# Altium PCB PCB.PcbDoc
Units mm, origin at the board's own origin, x right, y up, seen from the top; angles counter-clockwise.
Board outline 100 x 90 mm, 2 copper layers (Top Layer, Bottom Layer); 30 components, 42 nets, 137 pads, 3 vias.
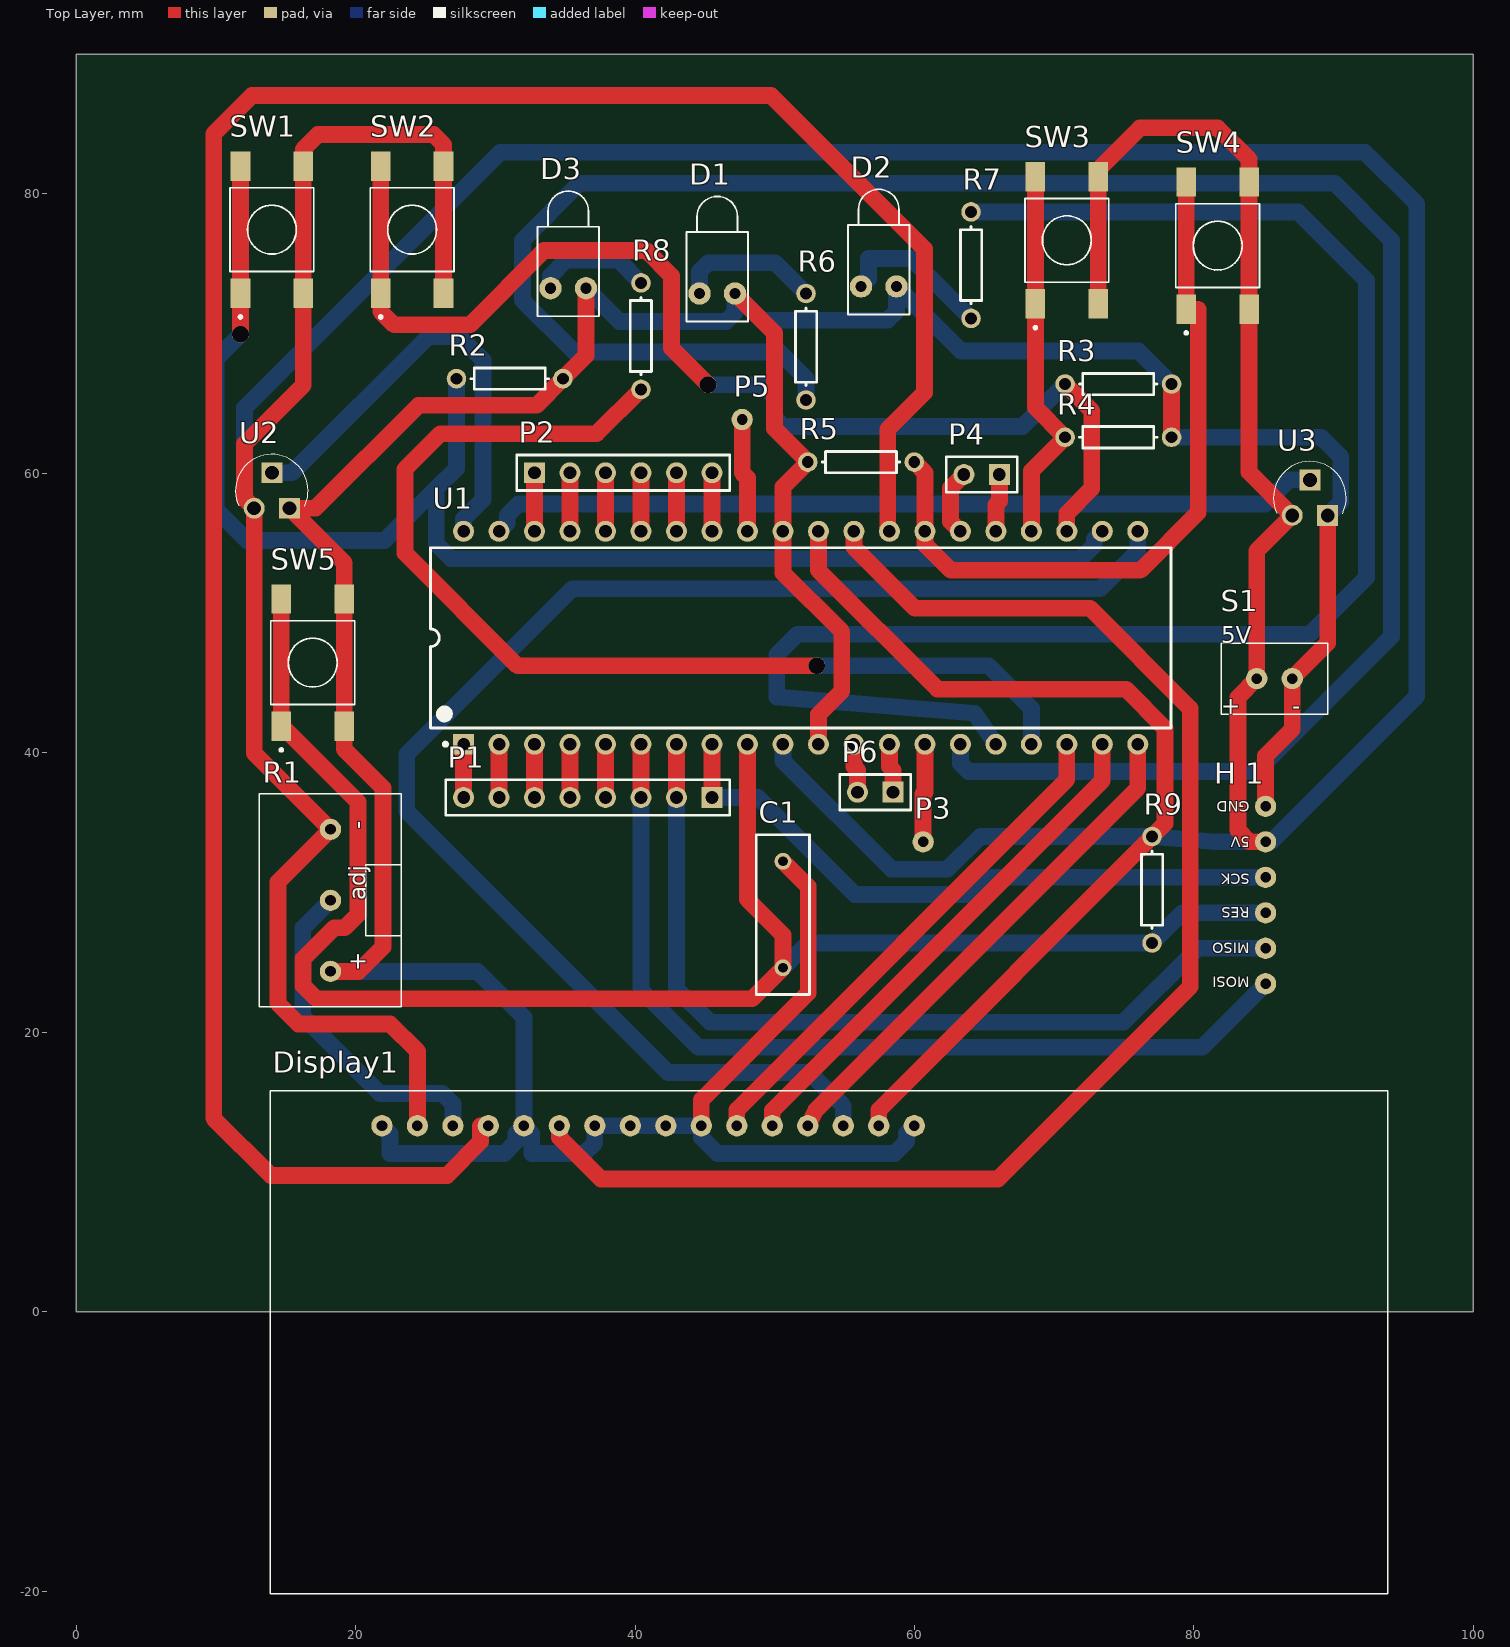
[diagram p0: Top Layer view]
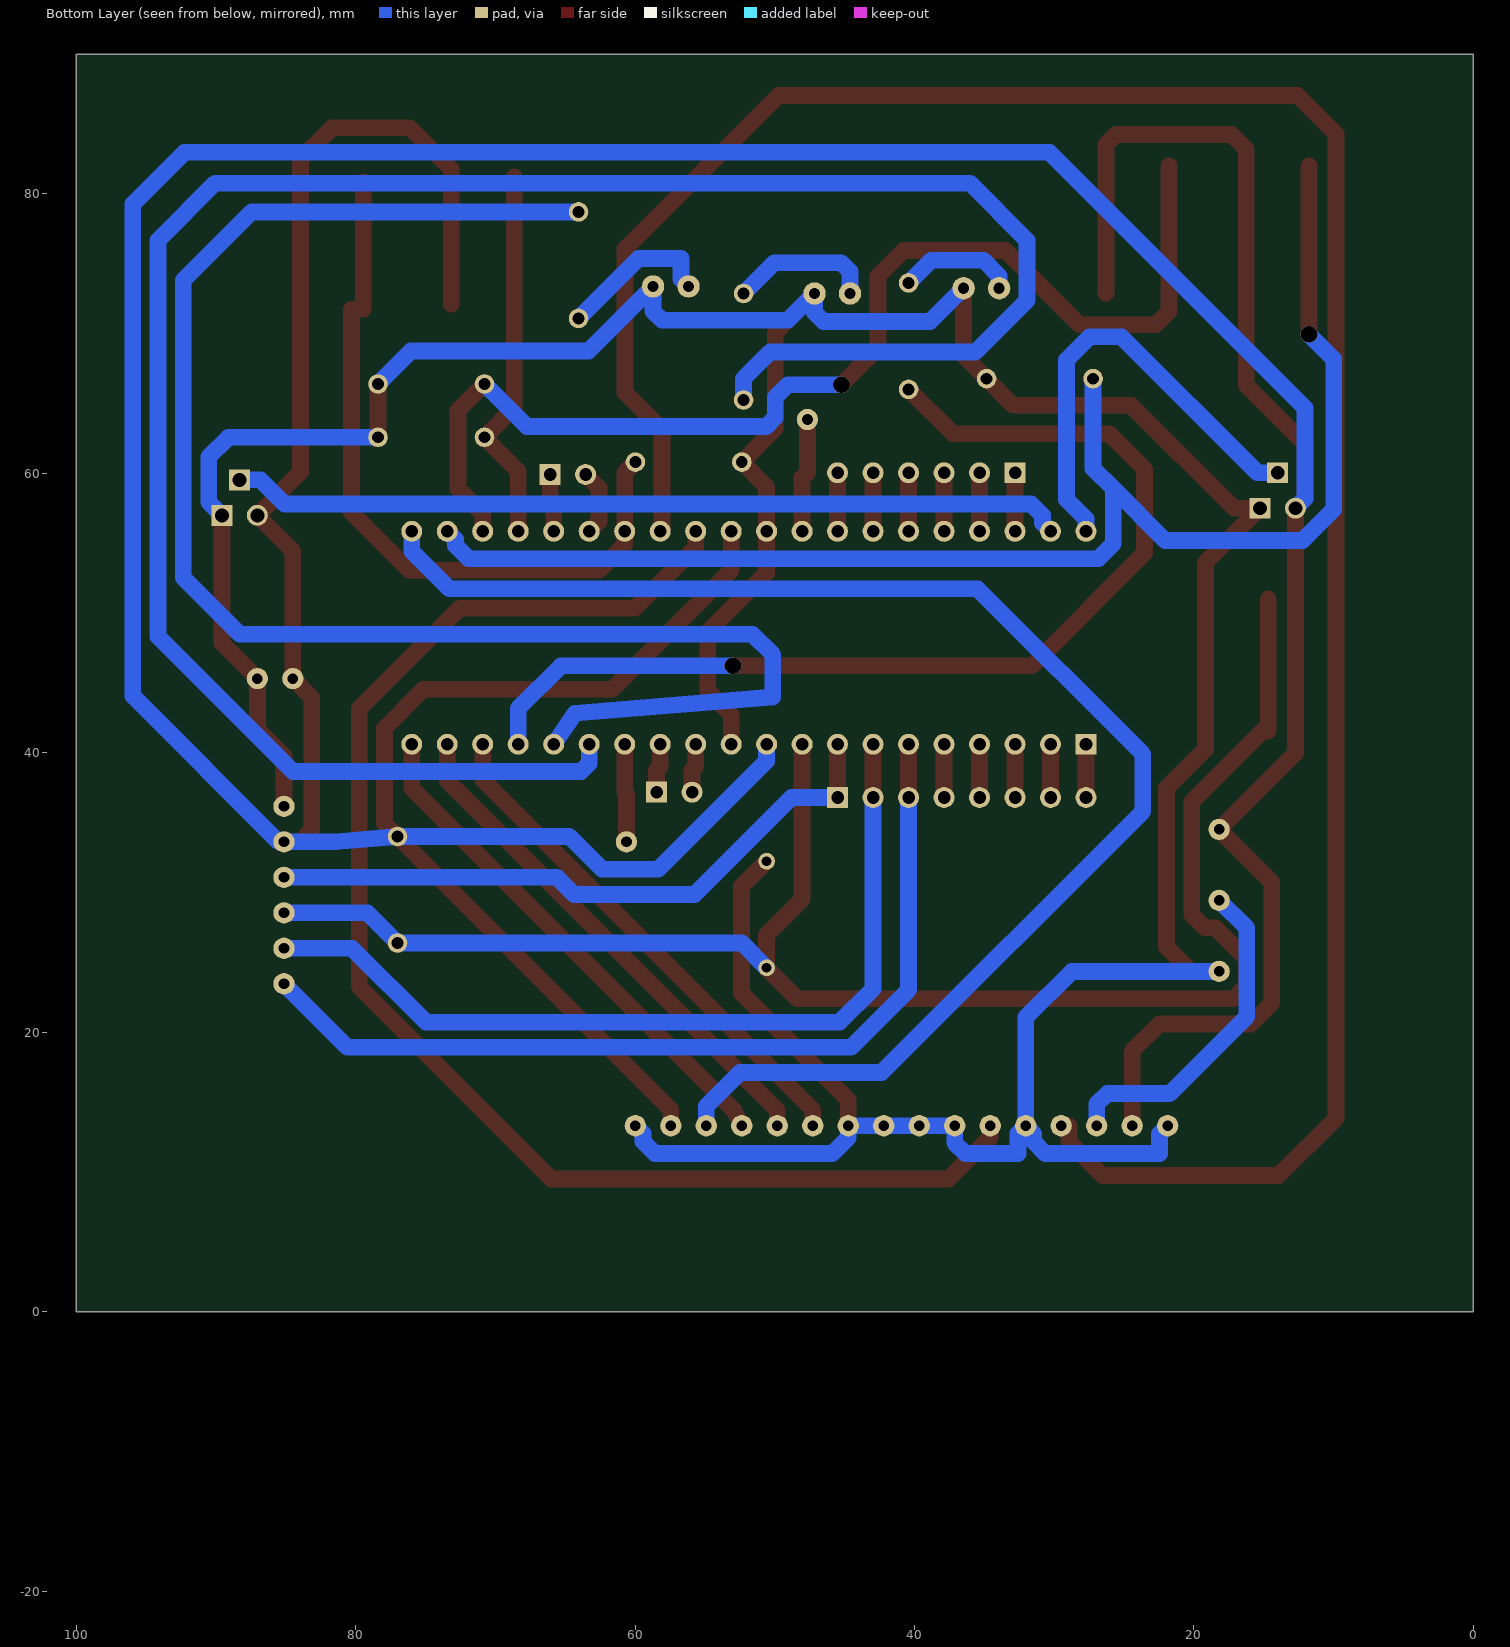
[diagram p1: Bottom Layer view, seen from below]

## Layer stack, top to bottom
Top Solder: solder mask 0.0102, Solder Resist, Dk 3.5
Top Layer: signal copper 0.0356
Dielectric 1: dielectric 0.32, FR-4, Dk 4.8
Bottom Layer: signal copper 0.0356
Bottom Solder: solder mask 0.0102, Solder Resist, Dk 3.5

## Board outline
0,90 100,90 100,0 0,0

## Design rules (kind name [scope] priority, off if disabled: settings)
Clearance [All] p1: gap=0.6 ignorepadtopadclearanceinfootprint=FALSE
PolygonConnect [All] p1: connectstyle=Relief reliefconductorwidth=0.254 reliefentries=4 polygonreliefangle="90 Angle" airgapwidth=0.254
RoutingVias [All] p1: holewidth=1.2 width=1.2 viastyle="Through Hole" minholewidth=1.2 minwidth=1.2 maxholewidth=1.2 maxwidth=1.2
SolderMaskExpansion [All] p1: expansion=0.102
Width [All] p1: maxlimit=1.5 minlimit=1 preferedwidth=1.2
30 further rules are at their usual default settings.

## Components (designator, comment, footprint, x,y, rotation, side; value= is the part's Value field where it differs from the comment)
C1 "Cap" RAD-0.3 50.584,28.42 r90 top value=10uF
D1 "LED1" LED-1 45.885,72.87 r90 top
D2 "LED1" LED-1 57.442,73.378 r90 top
D3 "LED1" LED-1 35.217,73.251 r90 top
Display1 "LCD 16 x 2" LCD16x2 13.882,15.807 r0 top
"H 1" "Programator" USBASP 85.128,23.467 r90 top
P1 "Header 8" HDR1X8 45.504,36.802 r180 top
P2 "Header 6" HDR1X6 32.804,60.043 r0 top
P3 "Header 1" "Header 1" 60.617,33.627 r0 top
P4 "Header 2" HDR1X2 66.078,59.916 r180 top
P5 "Header 1" "Header 1" 47.663,63.853 r0 top
P6 "Header 2" HDR1X2 58.458,37.183 r180 top
R1 "10k" ADJ_RES 18.199,29.436 r90 top
R2 "Res1" AXIAL-0.3 31.026,66.774 r180 top value=10K
R3 "Res1" AXIAL-0.3 74.587,66.393 r180 top value=10K
R4 "Res1" AXIAL-0.3 74.587,62.583 r180 top value=10K
R5 "Res1" AXIAL-0.3 56.172,60.805 r0 top value=10K
R6 "Res1" AXIAL-0.3 52.235,69.06 r270 top value=470
R7 "Res1" AXIAL-0.3 64.046,74.902 r90 top value=470
R8 "Res1" AXIAL-0.3 40.424,69.822 r270 top value=470
R9 "Res1" AXIAL-0.3 77,30.198 r270 top value=10K
S1 "Prikljucak 5V" "H 5V" 84.493,45.311 r0 top
SW1 "2-1437565-8" *SW_SMD_2-1437565-8_4_4.50_6.00_6.00_5.00 14.008,77.442 r90 top
SW2 "2-1437565-8" *SW_SMD_2-1437565-8_4_4.50_6.00_6.00_5.00 24.041,77.442 r90 top
SW3 "2-1437565-8" *SW_SMD_2-1437565-8_4_4.50_6.00_6.00_5.00 70.904,76.68 r90 top
SW4 "2-1437565-8" *SW_SMD_2-1437565-8_4_4.50_6.00_6.00_5.00 81.699,76.299 r90 top
SW5 "2-1437565-8" *SW_SMD_2-1437565-8_4_4.50_6.00_6.00_5.00 16.929,46.454 r90 top
U1 "ATmega32-16PI" 40P6 51.854,48.232 r90 top
U2 "LM35DZ" *TO127P254X495-3P 15.278,60.043 r0 top
U3 "LM35DZ" *TO127P254X495-3P 89.573,59.535 r0 top

## Footprints (in the part's own frame and the unit in brackets; to place one, negate y for a bottom-side part, rotate by r counter-clockwise, add the part's x,y. Pads: shape width x height; smd on the part's side, far side on the other; paste and mask are expansions set on the pad)
40P6 [mm] "DIP, 40-Leads, Row Spacing 15.24mm, Pitch 2.54mm, Body 52.2x13.95mm"
  rect 1.5x1.5 hole 0.9: 1(-7.62,24.13)
  round 1.5 hole 0.9: 2(-7.62,21.59) 3(-7.62,19.05) 4(-7.62,16.51) 5(-7.62,13.97) 6(-7.62,11.43) 7(-7.62,8.89) 8(-7.62,6.35) 9(-7.62,3.81) 10(-7.62,1.27) 11(-7.62,-1.27) 12(-7.62,-3.81) 13(-7.62,-6.35) 14(-7.62,-8.89) 15(-7.62,-11.43) 16(-7.62,-13.97) 17(-7.62,-16.51) 18(-7.62,-19.05) 19(-7.62,-21.59) 20(-7.62,-24.13) 21(7.62,-24.13) 22(7.62,-21.59) 23(7.62,-19.05) 24(7.62,-16.51) 25(7.62,-13.97) 26(7.62,-11.43) 27(7.62,-8.89) 28(7.62,-6.35) 29(7.62,-3.81) 30(7.62,-1.27) 31(7.62,1.27) 32(7.62,3.81) 33(7.62,6.35) 34(7.62,8.89) 35(7.62,11.43) 36(7.62,13.97) 37(7.62,16.51) 38(7.62,19.05) 39(7.62,21.59) 40(7.62,24.13)
  silkscreen extent -7.74,-26.5 6.45,26.5, body extent -7.05,-26.47 7.05,26.47, height 4.83
*SW_SMD_2-1437565-8_4_4.50_6.00_6.00_5.00 [mm]
  rect 2.1x1.4 smd: 1(-4.55,2.25) 2(4.55,2.25) 3(-4.55,-2.25) 4(4.55,-2.25)
  silkscreen extent -6.35,-3 3,3
*TO127P254X495-3P [mil]
  round 59 hole 39: 1(-100,-100)
  rect 59x59 hole 39: 2(-50,0) 3(0,-100)
  silkscreen extent -153,-95 52,52
ADJ_RES [mil] "Promenljivi Otpornik"
  round 60 hole 30: 1(-200,0) 2(200,0) 3(0,0)
  silkscreen extent -300,-200 300,200
AXIAL-0.3 [mm] "Axial Device, Thru-Hole; 2 Leads; 0.3 in Pin Spacing"
  round 1.4 hole 0.85: 1(-3.81,0) 2(3.81,0)
  silkscreen extent -2.77,-0.76 2.77,0.76
"H 5V" [mil] "prikljucak 5 volti"
  round 60 hole 30: 1(0,0) 2(100,0)
  silkscreen extent -100,-100 200,100
HDR1X2 [mm] "Connector; Header; 2 Position"
  rect 1.5x1.5 hole 0.9: 1(0,0)
  round 1.5 hole 0.9: 2(2.54,0)
  silkscreen extent -1.27,-1.27 3.81,1.27
HDR1X6 [mm] "Connector; Header; 6 Position"
  rect 1.5x1.5 hole 0.9: 1(0,0)
  round 1.5 hole 0.9: 2(2.54,0) 3(5.08,0) 4(7.62,0) 5(10.16,0) 6(12.7,0)
  silkscreen extent -1.27,-1.27 13.97,1.27
HDR1X8 [mm] "Connector; Header; 8 Position"
  rect 1.5x1.5 hole 0.9: 1(0,0)
  round 1.5 hole 0.9: 2(2.54,0) 3(5.08,0) 4(7.62,0) 5(10.16,0) 6(12.7,0) 7(15.24,0) 8(17.78,0)
  silkscreen extent -1.27,-1.27 19.05,1.27
"Header 1" [mil]
  round 60 hole 30: 1(0,0)
LCD16x2 [mil] "LCD16x2"
  round 60 hole 30: 1(314.96,-98.43) 2(414.96,-98.43) 3(514.96,-98.43) 4(614.96,-98.43) 5(714.96,-98.43) 6(814.96,-98.43) 7(914.96,-98.43) 8(1014.96,-98.43) 9(1114.96,-98.43) 10(1214.96,-98.43) 11(1314.96,-98.43) 12(1414.96,-98.43) 13(1514.96,-98.43) 14(1614.96,-98.43) 15(1714.96,-98.43) 16(1814.96,-98.43)
  silkscreen extent 0,-1417 3150,0
LED-1 [mm] "LED; 2 Leads"
  round 1.6 hole 0.8: 1(0,1.27) 2(0,-1.27)
  silkscreen extent -2,-2.2 6.95,2.2
RAD-0.3 [mm] "Radial Cap, Thru-Hole; 2 Leads; 0.3 in Pin Spacing"
  round 1.2 hole 0.7: 1(-3.81,0) 2(3.81,0)
  silkscreen extent -5.71,-1.91 5.71,1.91
USBASP [mil]
  round 60 hole 30: 1(0,0) 2(100,0) 3(200,0) 4(300,0) 5(400,0) 6(500,0)

## Part data
C1: "Capacitor", LatestRevisionDate=17-Jul-2002, LatestRevisionNote="Re-released for DXP Platform.", PackageDescription="Radial Cap, Thru-Hole; 2 Leads; 0.3 in Pin Spacing", PackageReference=RAD-0.3, Published=8-Jun-2000, Publisher="Altium Limited"
D1 D2 D3: "Typical RED GaAs LED", LatestRevisionDate=08-Jul-2005, LatestRevisionNote="Mech Layer 1 removed.", PackageDescription="LED; 2 Leads", PackageReference=LED-1, Published=8-Jun-2000, Publisher="Altium Limited"
Display1: library part "LCD 16 X 2"
"H 1": library part USBASP
P1: "Header, 8-Pin", LatestRevisionDate=17-Jul-2002, LatestRevisionNote="Re-released for DXP Platform.", Publisher="Altium Limited"
P2: "Header, 6-Pin", LatestRevisionDate=17-Jul-2002, LatestRevisionNote="Re-released for DXP Platform.", Publisher="Altium Limited"
P4 P6: "Header, 2-Pin", LatestRevisionDate=17-Jul-2002, LatestRevisionNote="Re-released for DXP Platform.", Publisher="Altium Limited"
R1: library part ADJ_RES
R2 R3 R4 R5 R6 R7 R8 R9: "Resistor", LatestRevisionDate=17-Jul-2002, LatestRevisionNote="Re-released for DXP Platform.", PackageDescription="Axial Device, Thru-Hole; 2 Leads; 0.3 in Pin Spacing", PackageReference=AXIAL-0.3, Published=8-Jun-2000, Publisher="Altium Limited"
S1: library part "Header 5V"
SW1 SW2 SW3 SW4 SW5: "Tactile Switch SPST-NO Top Actuated Surface Mount", Contact_Current_Rating="50 mA", Package=None, Availability=Unavailable, Configuration_Pole-Throw="Single Pole - Single Throw", MF="TE Connectivity", MP=2-1437565-8, Price=None, SnapEDA_Link=https://www.snapeda.com/parts/2-1437565-8/TE%20Connectivity%20ALCOSWITCH%20Switches/view-part/455292/?ref=snap, TE_purchase_URL=https://www.te.com/usa-en/product-2-1437565-8.html?te_bu=Cor&te_type=disp&te_campaign=seda_glo_cor-seda-global-disp-prtnr-fy19-seda-model-bom-cta_sma-317_1&elqCampaignId=32493
U1: "8-Bit AVR Microcontroller with 32K Bytes of In-System Programmable Flash Memory", Supplier Part Number 1=ATMEGA32-16PI-ND, Code_JEDEC=MS-011-AC, ComponentLink1Description=Datasheet, ComponentLink1URL=http://www.atmel.com/dyn/resources/prod_documents/doc2503.pdf, ComponentLink2Description="Atmel.com Home", ComponentLink2URL=http://www.atmel.com, DatasheetVersion=2503C-AVR-10/02, PackageDescription="40-lead (0.600\"/15.24mm Wide) Plastic Dual Inline Package (PDIP)", PackageReference=40P6, PackageVersion="revB, Sep-2001", Published=17-Sep-2003, Publisher="Altium Limited", Supplier 1=Digi-Key, Supplier 2=Farnell, Supplier 3=Mouser, Supplier Part Number 2=4376328, Supplier Part Number 3=556-ATMEGA32-16PI
U2 U3: "Temperature Sensor Analog, Local 0°C ~ 100°C 10mV/°C TO-92-3", Package="TO-226-3 Misc", Availability=Unavailable, MF="Texas Instruments", MP=LM35DZ, Price=None, SnapEDA_Link=https://www.snapeda.com/parts/LM35DZ/Texas%20Instruments/view-part/891192/?ref=snap

## Via types
v1: diameter 1.2, hole 1.2, Top Layer to Bottom Layer, 3 vias

## Nets (pads, with @x,y where several pads share a name; then routed paths per layer and width w, separated by ;. In a path a pad name is that pad's centre, name@x,y a point inside that pad or via, vN(x,y) a via of type N, cw(c..) or ccw(c..) an arc to the next point about the centre after c; other vN are vias at no path point)
+5V: "H 1.5" Display1.2 Display1.15 R1.2 R9.1 S1.1 SW1.3 SW1.4 SW2.3 SW2.4 SW3.3 SW3.4 SW4.3 SW4.4 U1.10 U1.30 U2.1 U3.1 | length 440.9
  Top Layer w1.2: Display1.2 24.422,18.641 22.469,20.594 15.913,20.594 14.437,22.07 14.437,30.754 R1.2 12.738,39.977 U2.1 12.052,58.189 12.052,62.111 16.258,66.317 SW1.3 SW1.4 16.258,83.197 17.31,84.249 25.565,84.249 26.291,83.523 SW2.4 SW2.3 ; U1.30 53.124,53.057 61.632,44.549 75.14,44.549 77.934,41.755 77.934,34.942 R9.1 57.442,14.45 Display1.15 ; SW3.3 SW3.4 73.154,81.76 76.126,84.732 81.699,84.732 83.949,82.482 SW4.4 SW4.3 83.949,60.079 U3.1 84.493,54.455 S1.1 83.147,43.965 83.147,34.465 83.985,33.627 85.128,33.627
  Bottom Layer w1.2: U2.1 12.052,58.189 12.052,64.691 30.34,82.979 92.24,82.979 95.948,79.271 95.948,44.066 85.509,33.627 85.128,33.627 81.445,33.627 R9.1 64.706,34.008 62.363,31.665 58.337,31.665 50.584,39.418 U1.10
GND: "H 1.6" C1.2 D1.2 D2.2 D3.2 Display1.1 Display1.5 Display1.7 Display1.8 Display1.9 Display1.10 Display1.16 R1.1 R2.1 R3.1 R4.1 R5.1 S1.2 SW5.3 SW5.4 U1.11 U1.31 U2.3 U3.3 | length 293.2
  Top Layer w1.2: R1.1 20.212,24.356 21.961,26.105 21.961,37.474 19.179,40.256 SW5.3 SW5.4 19.179,53.602 U2.3 17.135,57.503 24.506,64.874 32.936,64.874 R2.1 36.487,68.425 D3.2 ; Display1.10 44.742,15.161 52.387,22.807 52.387,30.427 C1.2 ; D1.2 49.974,70.051 49.974,63.193 R5.1 50.584,59.027 U1.31 50.584,52.877 54.797,48.664 54.797,44.425 53.124,42.752 U1.11 ; R4.1 R3.1 ; 85.128,36.167 85.128,39.774 87.033,41.679 S1.2 89.573,47.851 U3.3
  Bottom Layer w1.2: R1.1 28.74,24.356 32.042,21.054 Display1.5 ; Display1.1 22.466,12.723 22.466,11.326 30.645,11.326 31.458,12.139 31.458,12.723 Display1.5 ; D3.2 38.875,70.863 46.52,70.863 47.155,71.498 D1.2 49.06,70.965 58.077,70.965 58.712,71.6 D2.2 63.335,68.755 76.035,68.755 R3.1 ; Display1.16 59.423,12.748 59.423,12.164 58.585,11.326 45.885,11.326 44.742,12.469 Display1.10 Display1.9 Display1.8 Display1.7 37.122,12.088 36.36,11.326 32.601,11.326 32.601,12.748 Display1.5 ; R4.1 89.116,62.583 90.513,61.186 90.513,57.935 U3.3
NetC1_1: "H 1.3" C1.1 R9.2 SW5.1 SW5.2 U1.9 | length 121.1
  Top Layer w1.2: SW5.2 SW5.1 14.679,41.552 15.087,41.552 20.161,36.478 20.161,28.42 19.215,27.474 18.466,27.474 16.237,25.245 16.237,23.34 17.183,22.394 48.368,22.394 C1.1 50.584,26.972 48.044,29.512 U1.9
  Bottom Layer w1.2: C1.1 52.362,26.388 R9.2 79.159,28.547 85.128,28.547
NetD1_1: D1.1 R6.1 | length 10.4
  Bottom Layer w1.2: D1.1 44.615,74.445 45.25,75.08 50.025,75.08 R6.1
NetD2_1: D2.1 R7.1 | length 11.3
  Bottom Layer w1.2: D2.1 56.705,73.911 56.705,75.385 59.753,75.385 R7.1
NetD3_1: D3.1 R8.1 | length 8.5
  Bottom Layer w1.2: D3.1 33.947,74.14 35.065,75.258 38.798,75.258 R8.1
NetDisplay1_3: Display1.3 R1.3 | length 24
  Bottom Layer w1.2: R1.3 16.218,27.455 16.218,21.13 21.73,15.618 26.2,15.618 26.962,14.856 Display1.3
NetDisplay1_4: Display1.4 U1.28 | length 171.9
  Top Layer w1.2: Display1.4 28.943,13.307 28.943,12.164 26.53,9.751 13.932,9.751 9.842,13.84 9.842,84.3 12.586,87.043 49.746,87.043 60.719,76.07 60.719,65.783 58.077,63.142 58.077,55.979 U1.28
NetDisplay1_6: Display1.6 U1.29 | length 102.8
  Top Layer w1.2: Display1.6 34.582,12.469 37.554,9.497 65.976,9.497 79.734,23.255 79.734,43.187 72.58,50.34 60.033,50.34 55.664,54.709 U1.29
NetDisplay1_11: Display1.11 U1.18 | length 37.1
  Top Layer w1.2: Display1.11 47.282,14.45 70.904,38.072 U1.18
NetDisplay1_12: Display1.12 U1.19 | length 37.1
  Top Layer w1.2: Display1.12 49.822,14.402 73.444,38.024 U1.19
NetDisplay1_13: Display1.13 U1.20 | length 37
  Top Layer w1.2: Display1.13 52.946,14.45 75.984,37.488 U1.20
NetDisplay1_14: Display1.14 U1.21 | length 105.2
  Bottom Layer w1.2: Display1.14 54.902,14.704 52.489,17.117 42.354,17.117 23.66,35.811 23.66,39.901 35.496,51.737 73.292,51.737 75.984,54.43 U1.21
"NetH 1_1": "H 1.1" P1.3 U1.6 | length 65.9
  Top Layer w1.2: P1.3 U1.6
  Bottom Layer w1.2: P1.3 40.424,23.035 44.542,18.917 80.578,18.917 85.128,23.467
"NetH 1_2": "H 1.2" P1.2 U1.7 | length 62.8
  Top Layer w1.2: P1.2 U1.7
  Bottom Layer w1.2: P1.2 42.964,23.111 45.358,20.717 74.967,20.717 80.257,26.007 85.128,26.007
"NetH 1_4": "H 1.4" P1.1 U1.8 | length 46.8
  Top Layer w1.2: P1.1 U1.8
  Bottom Layer w1.2: P1.1 48.799,36.802 55.736,29.865 64.355,29.865 65.577,31.087 85.128,31.087
NetP1_4: P1.4 U1.5 | length 3.8
  Top Layer w1.2: P1.4 U1.5
NetP1_5: P1.5 U1.4 | length 3.8
  Top Layer w1.2: P1.5 U1.4
NetP1_6: P1.6 U1.3 | length 3.8
  Top Layer w1.2: P1.6 U1.3
NetP1_7: P1.7 U1.2 | length 3.8
  Top Layer w1.2: P1.7 U1.2
NetP1_8: P1.8 U1.1 | length 3.8
  Top Layer w1.2: P1.8 U1.1
NetP2_1: P2.1 U1.38 | length 4.2
  Top Layer w1.2: U1.38 P2.1
NetP2_2: P2.2 U1.37 | length 4.2
  Top Layer w1.2: U1.37 P2.2
NetP2_3: P2.3 U1.36 | length 4.2
  Top Layer w1.2: U1.36 P2.3
NetP2_4: P2.4 U1.35 | length 4.2
  Top Layer w1.2: U1.35 P2.4
NetP2_5: P2.5 U1.34 | length 4.2
  Top Layer w1.2: U1.34 P2.5
NetP2_6: P2.6 U1.33 | length 4.2
  Top Layer w1.2: U1.33 P2.6
NetP3_1: P3.1 U1.14 | length 7
  Top Layer w1.2: P3.1 60.617,37.056 60.744,37.183 U1.14
NetP4_1: P4.1 U1.25 | length 4.2
  Top Layer w1.2: U1.25 65.824,57.757 66.078,58.011 P4.1
NetP4_2: P4.2 U1.26 | length 4.8
  Top Layer w1.2: U1.26 62.573,56.563 62.573,58.951 P4.2
NetP5_1: P5.1 U1.32 | length 8.2
  Top Layer w1.2: P5.1 47.663,60.043 48.044,59.662 U1.32
NetP6_1: P6.1 U1.13 | length 3.5
  Top Layer w1.2: U1.13 58.204,39.012 58.458,38.758 P6.1
NetP6_2: P6.2 U1.12 | length 3.5
  Top Layer w1.2: U1.12 55.664,39.012 55.918,38.758 P6.2
NetR2_2: R2.2 SW1.1 SW1.2 U1.22 | length 105.1
  Top Layer w1.2: v1(11.758,69.949) SW1.1 SW1.2
  Bottom Layer w1.2: v1(11.758,69.949) 10,68.191 10,57.422 12.23,55.192 22.06,55.192 25.768,58.9 ; R2.2 27.216,60.348 25.768,58.9 ; U1.22 72.86,55.268 72.86,54.836 71.92,53.896 26.835,53.896 25.768,54.963 25.768,58.9
NetR3_2: R3.2 SW2.1 SW2.2 U1.23 | length 84.4
  Top Layer w1.2: SW2.2 SW2.1 21.791,71.6 22.756,70.635 28.181,70.635 33.49,75.943 40.805,75.943 42.608,74.14 42.608,68.958 v1(45.225,66.342) ; R3.2 72.682,64.488 72.682,58.9 70.904,57.122 U1.23
  Bottom Layer w1.2: v1(45.225,66.342) 49.06,66.342 49.974,65.428 49.974,63.98 50.609,63.345 67.729,63.345 R3.2
NetR4_2: R4.2 SW3.1 SW3.2 U1.24 | length 27.3
  Top Layer w1.2: U1.24 68.364,60.17 R4.2 68.654,64.706 SW3.1 SW3.2
NetR5_2: R5.2 SW4.1 SW4.2 U1.27 | length 52.8
  Top Layer w1.2: R5.2 60.744,60.043 U1.27 60.744,54.912 62.598,53.058 76.162,53.058 80.302,57.198 80.302,71.752 SW4.1@79.449,71.752 ; SW4.1 SW4.1@79.449,71.752 ; SW4.2 SW4.1@79.449,71.752
NetR6_2: R6.2 U1.15 | length 158.9
  Bottom Layer w1.2: R6.2 52.235,66.774 50.33,68.679 35.649,68.679 31.94,72.387 31.94,76.68 36.03,80.769 90.056,80.769 94.145,76.68 94.145,48.308 84.493,38.656 63.868,38.656 63.284,39.24 U1.15
NetR7_2: R7.2 U1.16 | length 116
  Bottom Layer w1.2: R7.2 87.439,78.712 92.342,73.81 92.342,52.55 88.271,48.479 51.6,48.479 50.146,47.025 50.146,43.997 64.3,42.822 U1.16
NetR8_2: R8.2 U1.17 | length 77.3
  Top Layer w1.2: R8.2 37.249,62.837 26.073,62.837 23.533,60.297 23.533,54.292 31.6,46.225 v1(52.997,46.225)
  Bottom Layer w1.2: v1(52.997,46.225) 65.316,46.225 68.364,43.177 U1.17
NetU1_39: U1.39 U3.2 | length 59.9
  Bottom Layer w1.2: U1.39 30.848,56.436 30.848,56.995 31.661,57.808 85.077,57.808 86.804,59.535 U3.2
NetU1_40: U1.40 U2.2 | length 32.7
  Bottom Layer w1.2: U2.2 15.453,60.043 25.181,69.771 27.47,69.771 29.121,68.12 29.121,58.138 27.724,56.741 U1.40

## Text inside footprints (layer, text, board x,y; h text height)
"H 1": Top Overlay "GND" at 83.985,36.548 h0.76 r180; Top Overlay "5V" at 83.985,34.008 h0.76 r180; Top Overlay "SCK" at 83.985,31.341 h0.76 r180; Top Overlay "RES" at 83.985,28.928 h0.76 r180; Top Overlay "MISO" at 83.985,26.388 h0.76 r180; Top Overlay "MOSI" at 83.985,23.975 h0.76 r180
R1: Top Overlay "+" at 20.739,24.356 h1.2 r90; Top Overlay "-" at 20.739,34.516 h1.2 r90; Top Overlay "adj" at 20.739,29.436 h1.2 r90
S1: Top Overlay "-" at 87.033,42.771 h1.2; Top Overlay "+" at 81.953,42.771 h1.2; Top Overlay "5V" at 81.953,47.851 h1.2